# Altium PCB Preamp.PcbDoc
Units mil, origin at the board's own origin, x right, y up, seen from the top; angles counter-clockwise.
Board outline 2086.61 x 2834.65 mil, 2 copper layers (Top Layer, Bottom Layer); 45 components, 34 nets, 142 pads, 16 vias.
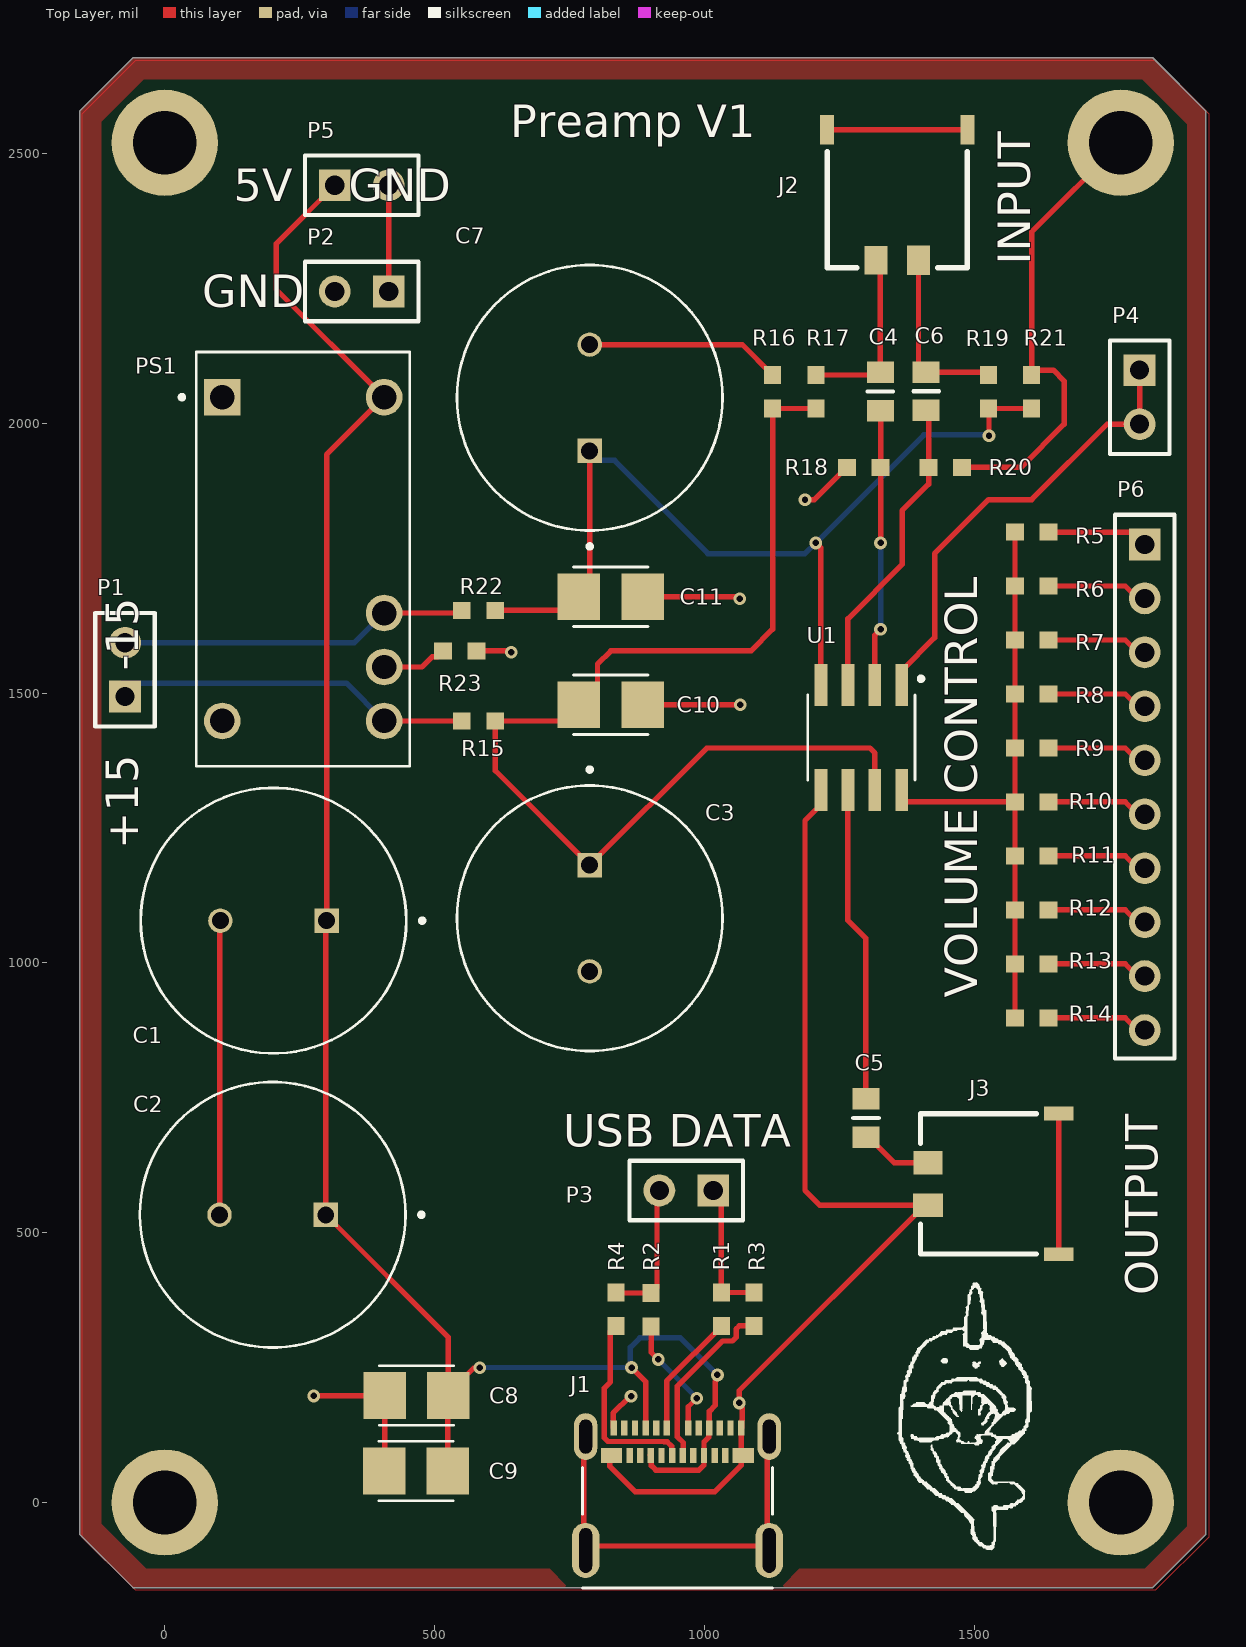
[diagram p0: Top Layer view]
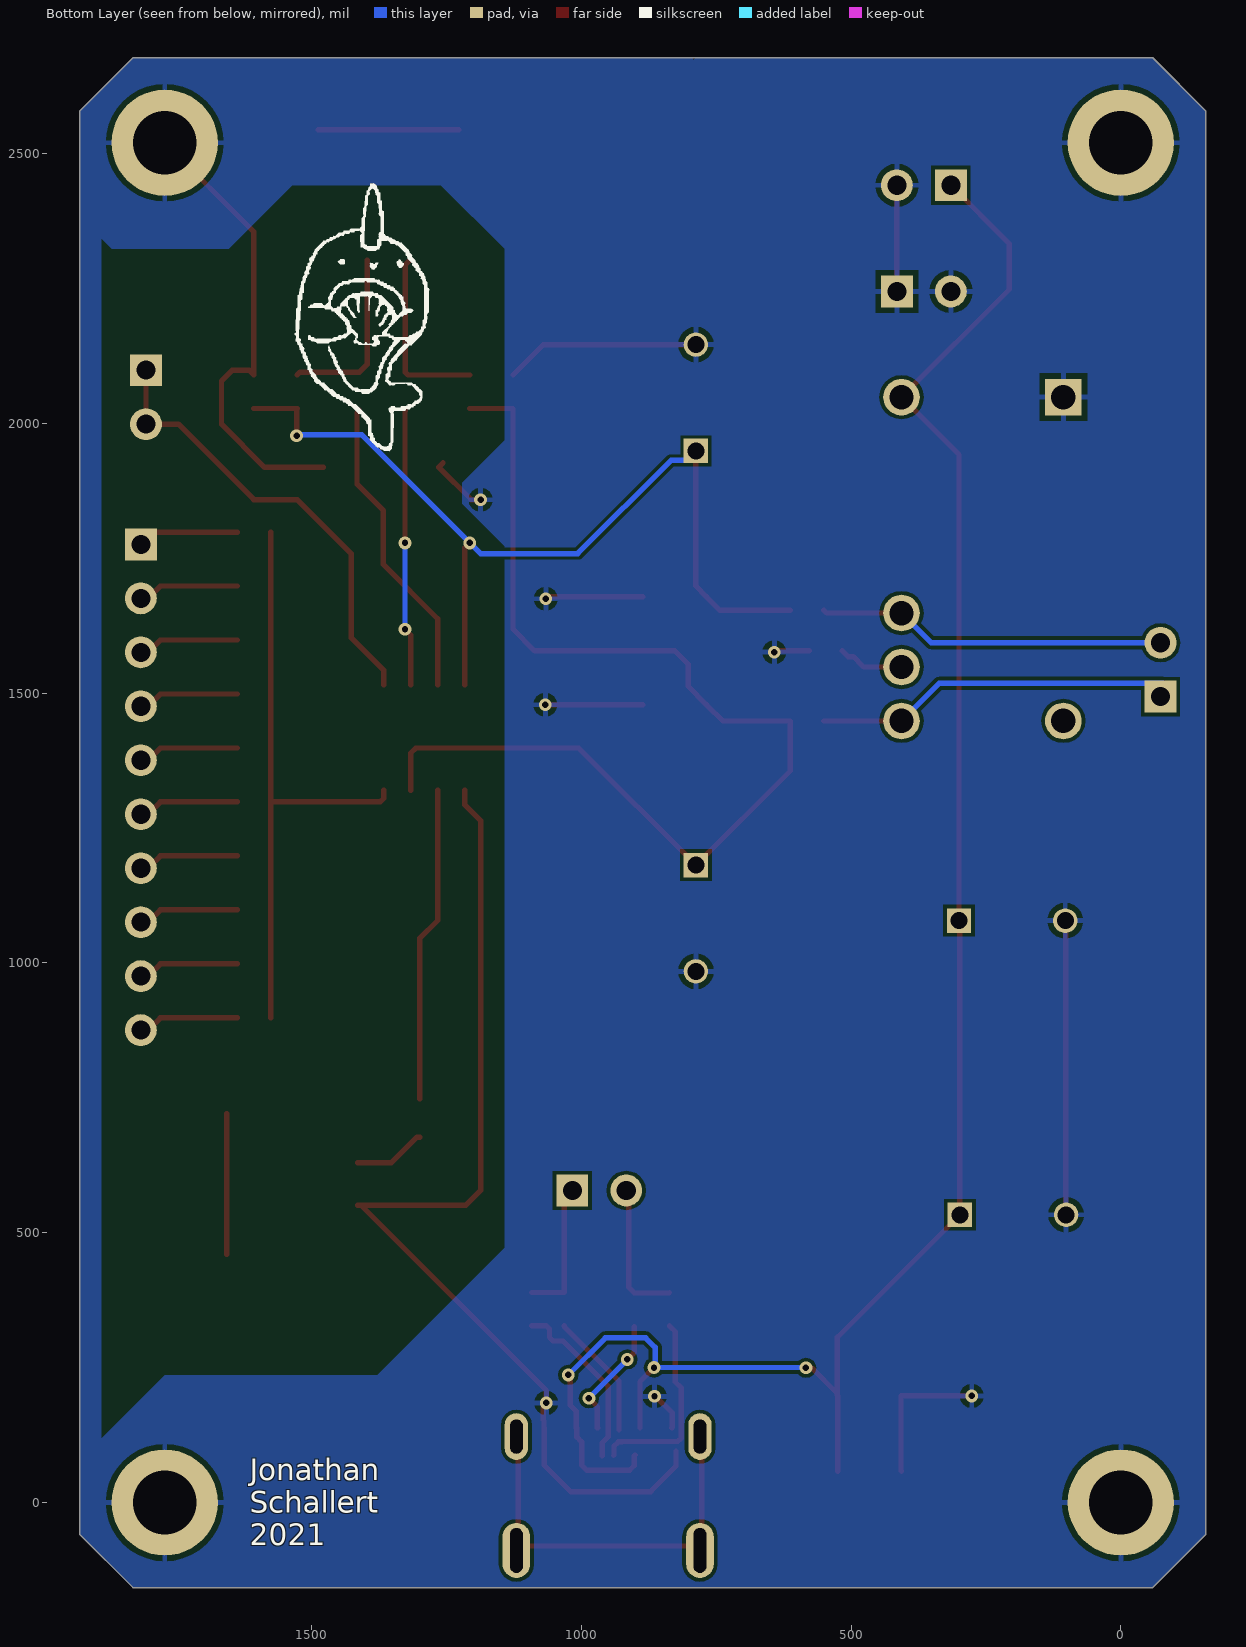
[diagram p1: Bottom Layer view, seen from below]
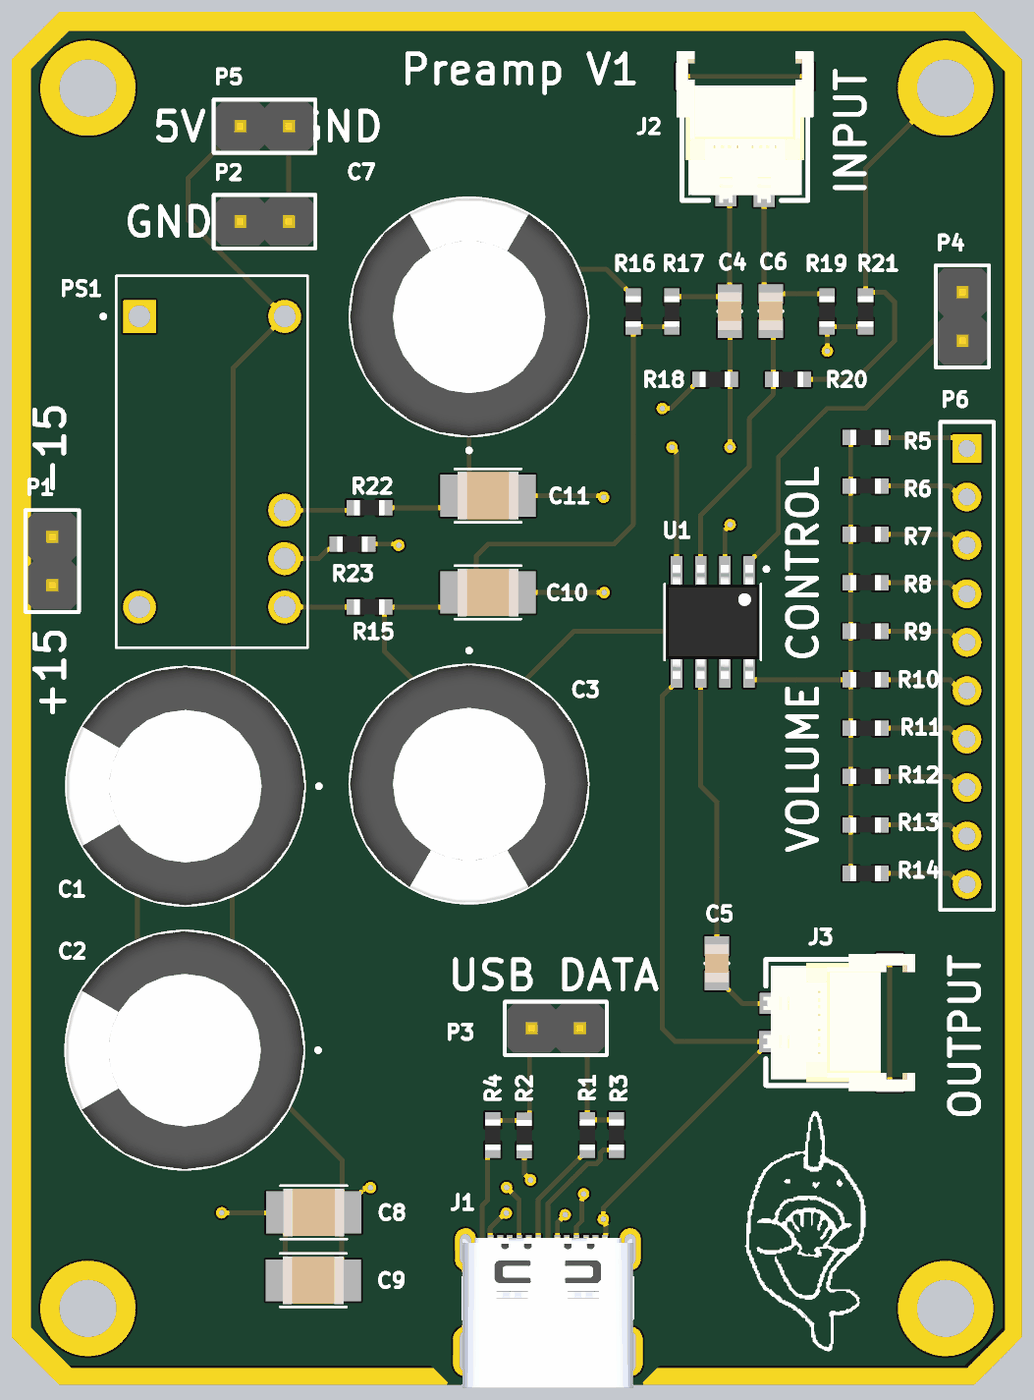
[diagram p2: 3D render of the assembled board from above, using the file's embedded part models]

## Layer stack, top to bottom
Top Solder: solder mask 0.4, Solder Resist, Dk 3.5
Top Layer: signal copper 1.4
Dielectric 1: dielectric 12.6, FR-4, Dk 4.8
Bottom Layer: signal copper 1.4
Bottom Solder: solder mask 0.4, Solder Resist, Dk 3.5

## Board outline
-157.48,-59.06 -59.06,-157.48 1830.71,-157.48 1929.13,-59.06 1929.13,2578.74 1830.71,2677.17 -59.06,2677.17 -157.48,2578.74

## Design rules (kind name [scope] priority, off if disabled: settings)
Clearance Clearance_to_Keepout [IsKeepOut] p1: gap=0 ignorepadtopadclearanceinfootprint=FALSE
Clearance [All] p2: gap=6.5 ignorepadtopadclearanceinfootprint=FALSE
Height [All] p1: minheight=0 maxheight=5000 prefheight=500
HoleSize [All] p1: absolutevalues=TRUE maxlimit=500 minlimit=1 maxpercent=80.000 minpercent=20.000
MinimumSolderMaskSliver [All] p1: minsoldermaskwidth=2
PolygonConnect [All] p1: connectstyle=Relief reliefconductorwidth=10 reliefentries=4 polygonreliefangle="90 Angle" airgapwidth=10
RoutingVias [All] p1: holewidth=28 width=50 viastyle="Through Hole" minholewidth=28 minwidth=50 maxholewidth=28 maxwidth=50
SilkToSilkClearance [All] p1: silktosilkclearance=2
SilkToSolderMaskClearance [IsPad] p1: minsilkscreentomaskgap=2 clearancetoexposedcopper=TRUE
SolderMaskExpansion [All] p1: expansion=4 istentingtop=FALSE
Width [All] p1: maxlimit=10 minlimit=8 preferedwidth=10
25 further rules are at their usual default settings.

## Components (designator, comment, footprint, x,y, rotation, side; value= is the part's Value field where it differs from the comment)
C1 "2200uF" CAP-RADIAL-12.5MM 201.46,1078.27 r180 top
C2 "2200uF" CAP-RADIAL-12.5MM 199.88,533.27 r180 top
C3 "2200uF" CAP-RADIAL-12.5MM 787.4,1082.68 r270 top
C4 "22uF" 0805-CAP 1325.83,2058.82 r270 top
C5 "22uF" 0805-CAP 1299.21,712.6 r270 top
C6 "22uF" 0805-CAP 1410.83,2059.25 r270 top
C7 "2200uF" CAP-RADIAL-12.5MM 787.4,2047.24 r90 top
C8 "10uF" 1210-CAP 466.46,198.27 r180 top
C9 "10uF" 1210-CAP 465.51,58.27 r180 top
C10 "10uF" 1210-CAP 826.46,1478.27 r180 top
C11 "10uF" 1210-CAP 826.46,1678.27 r0 top
J1 "WM12856CT-ND" USBC_MOLEX 950,-10 r0 top
J2 "DF59-2S-2V(51)" SNAPBEE_DF59-2S-2V 1357.32,2422.83 r0 top
J3 "DF59-2S-2V(51)" SNAPBEE_DF59-2S-2V 1535.43,590.55 r270 top
P1 "HEADER_1x2" PIN2 -73.54,1493.27 r90 top
P2 "HEADER_1x2" PIN2 414.96,2244.09 r180 top
P3 "HEADER_1x2" PIN2 1016.46,578.27 r180 top
P4 "HEADER_1x2" PIN2 1806.46,2098.27 r270 top
P5 "HEADER_1x2" PIN2 314.96,2440.94 r0 top
P6 "HEADER_1x10" PIN10 1815.91,1775.43 r270 top
PS1 "NMV0515DC" CONV_NMV0515DC 256.46,1748.27 r0 top
R1 "0Ω" 0603_RES 1031.46,358.27 r90 top
R2 "0Ω" 0603_RES 901.46,357.26 r90 top
R3 "0Ω" 0603_RES 1091.46,358.27 r90 top
R4 "0Ω" 0603_RES 836.46,358.27 r90 top
R5 "0Ω" 0603_RES 1606.46,1798.27 r0 top
R6 "0Ω" 0603_RES 1606.46,1698.27 r0 top
R7 "0Ω" 0603_RES 1606.46,1598.27 r0 top
R8 "0Ω" 0603_RES 1606.46,1498.27 r0 top
R9 "0Ω" 0603_RES 1606.46,1398.27 r0 top
R10 "0Ω" 0603_RES 1606.46,1298.27 r0 top
R11 "0Ω" 0603_RES 1606.46,1198.27 r0 top
R12 "0Ω" 0603_RES 1606.46,1098.27 r0 top
R13 "0Ω" 0603_RES 1606.46,998.27 r0 top
R14 "0Ω" 0603_RES 1606.46,898.27 r0 top
R15 "100Ω" 0603_RES 581.46,1448.27 r180 top
R16 "2K2Ω" 0603_RES 1126.46,2058.27 r270 top
R17 "2K2Ω" 0603_RES 1206.46,2058.27 r270 top
R18 "3K9Ω" 0603_RES 1295.45,1918.27 r180 top
R19 "2K2Ω" 0603_RES 1526.46,2058.27 r90 top
R20 "3K9Ω" 0603_RES 1446.46,1918.27 r180 top
R21 "2K2Ω" 0603_RES 1606.46,2058.27 r90 top
R22 "100Ω" 0603_RES 581.46,1653.27 r180 top
R23 "0Ω" 0603_RES 546.46,1578.27 r0 top
U1 "1512S08-U" SOIC-8_N 1290.83,1417.52 r270 top

## Footprints (in the part's own frame and the unit in brackets; to place one, negate y for a bottom-side part, rotate by r counter-clockwise, add the part's x,y. Pads: shape width x height; smd on the part's side, far side on the other; paste and mask are expansions set on the pad)
0603_RES [mil]
  rect 33x31.5 smd: 1(-31,0) 2(31,0)
  body extent -31,-16 31,16, height 18
0805-CAP [mil] "Chip Capacitor"
  rect 40x50 smd: 1(-35.43,0) 2(35.43,0)
  silkscreen extent 0,-24 0,24, body extent -39,-25 39,25, height 24
1210-CAP [mm]
  rect 2x2.2 smd: 1(-1.5,0) 2(1.5,0)
  silkscreen extent -1.75,-1.4 1.75,1.4, body extent -1.6,-1.25 1.6,1.25, height 0.79
CAP-RADIAL-12.5MM [mm]
  round 1.15 hole 0.8: N(2.5,0)
  rect 1.15x1.15 hole 0.8: P(-2.5,0)
  silkscreen extent -7.1,-6.25 6.25,6.25, body extent -6.25,-6.25 6.25,6.25, height 27
CONV_NMV0515DC [mm]
  rect 1.725x1.725 hole 1.15: 1(-3.81,7.62)
  round 1.725 hole 1.15: 7(-3.81,-7.62) 8(3.81,-7.62) 9(3.81,-5.08) 10(3.81,-2.54) 14(3.81,7.62)
  silkscreen extent -5.81,-9.75 5.01,9.75
PIN2 [mm] "2x1 Header 0.1mm"
  rect 1.5x1.5 hole 0.9: 1(0,0)
  round 1.5 hole 0.9: 2(2.54,0)
  silkscreen extent -1.4,-1.4 3.94,1.4, body extent -1.27,-1.27 3.81,1.27, height 10.11
PIN10 [mm] "4x1 Header 0.1mm"
  rect 1.5x1.5 hole 0.9: 1(0,0)
  round 1.5 hole 0.9: 2(2.54,0) 3(5.08,0) 4(7.62,0) 5(10.16,0) 6(12.7,0) 7(15.24,0) 8(17.78,0) 9(20.32,0) 10(22.86,0)
  silkscreen extent -1.4,-1.4 24.2,1.4
SNAPBEE_DF59-2S-2V [mm] "CONN SSL RCPT 2POS 2MM SOLDER"
  rect 1.1x1.35 smd: 1(-1,-3.075)
  rect 1.1x1.4 smd: 2(1,-3.075)
  rect 0.65x1.4 smd: S1(-3.31,3.075) S2(3.31,3.075)
  silkscreen extent -3.3,-3.43 3.3,2.03, body extent -3.6,-3.56 3.6,4.39, height 2.31
SOIC-8_N [mm]
  rect 1.97x0.6 smd: 1(-2.475,1.905) 2(-2.475,0.635) 3(-2.475,-0.635) 4(-2.475,-1.905) 5(2.475,-1.905) 6(2.475,-0.635) 7(2.475,0.635) 8(2.475,1.905)
  silkscreen extent -2.87,-2.52 2,2.91, body extent -3,-2.45 3,2.45, height 1.75
USBC_MOLEX [mm] "105450-0101"
  rect 0.3x0.7 smd: A1(-3,3.77) A2(-2.5,3.77) A3(-2,3.77) A4(-1.5,3.77) A5(-1,3.77) A6(-0.5,3.77) A7(0.5,3.77) A8(1,3.77) A9(1.5,3.77) A10(2,3.77) A11(2.5,3.77) A12(3,3.77) B2(2.25,2.47) B3(1.75,2.47) B4(1.25,2.47) B5(0.75,2.47) B6(0.25,2.47) B7(-0.25,2.47) B8(-0.75,2.47) B9(-1.25,2.47) B10(-1.75,2.47) B11(-2.25,2.47)
  rect 1x0.7 smd: B1(3.1,2.47) B12(-3.1,2.47)
  oval 1.1x2.2 hole 0.6 slot 1.6 at 90 deg: S1(-4.32,3.36) S2(4.32,3.36)
  oval 1.3x2.6 hole 0.6 slot 2.1 at 90 deg: S3(-4.32,-2) S4(4.32,-2)
  silkscreen extent -4.47,-3.77 4.47,1.9, body extent -4.47,-3.9 4.47,4, height 3.25

## Part data
C1 C2 C3 C7: library part UFW1C222MHD, "CAP ALUM 2200UF 20% 16V RADIAL", Package="RADIAL-2 Panasonic", Supplier Part Number 1=493-15122-ND, Availability="In Stock", Check_prices=https://www.snapeda.com/parts/EEUHD1V681B/Panasonic/view-part/5784870/?ref=eda, MF=Panasonic, MP=EEUHD1V681B, Price=None, Purchase-URL=https://pricing.snapeda.com/search/part/EEUHD1V681B/?ref=eda, SnapEDA_Link=https://www.snapeda.com/parts/EEUHD1V681B/Panasonic/view-part/5784870/?ref=snap, Supplier 1=Digi-Key
C4 C5 C6: library part CAP_22U_0805, "CAP CER 22UF 16V X5R 0805", Supplier Part Number 1=1276-6526-1-ND, LatestRevisionDate=17-Jul-2002, LatestRevisionNote="Re-released for DXP Platform.", PackageDescription="Radial Cap, Thru-Hole; 2 Leads; 0.3 in Pin Spacing", PackageReference=RAD-0.3, Published=8-Jun-2000, Publisher="Altium Limited", Supplier 1=Digi-Key
C8 C9 C10 C11: library part CAP_10U_1210, "CAP CER 10UF 25V X7R 1210", Supplier Part Number 1=445-8792-1-ND, LatestRevisionDate=17-Jul-2002, LatestRevisionNote="Re-released for DXP Platform.", PackageDescription="Radial Cap, Thru-Hole; 2 Leads; 0.3 in Pin Spacing", PackageReference=RAD-0.3, Published=8-Jun-2000, Publisher="Altium Limited", Supplier 1=Digi-Key
J1: library part USB-C, "CONN RCP USB3.1 TYPEC 24P SMD RA", Package=None, Digi-Key_Part_Number=WM12856CT-ND, Digi-Key_Purchase_URL=https://www.digikey.tw/product-detail/en/molex/1054500101/WM12856CT-ND/5843891?utm_source=snapeda&utm_medium=aggregator&utm_campaign=symbol, MF=Molex, MP=1054500101, SnapEDA_Link=https://www.snapeda.com/parts/1054500101/Molex/view-part/448528/?ref=snap, Supplier 1=Digi-Key, Supplier Part Number 1=WM12856CT-ND
J2 J3: library part SNAPBEE_DF59-2S-2V, "CONN SSL RCPT 2POS 2MM SOLDER", Supplier Part Number 1=H11961CT-ND, Supplier 1=Digi-Key, Supplier 2=Digi-Key, Supplier 3=Digi-Key, Supplier Part Number 2=H11958-ND, Supplier Part Number 3=H11957CT-ND
PS1: "Isolated 1W Dual Output DC-DC Converter 3kVDC, 4.5-9V Input", Package=None, Supplier Part Number 1=811-3396-5-ND, Availability=Unavailable, MP=NMV0515DC, Price=None, Supplier 1=Digi-Key
R1 R2 R3 R4 R5 R6 R7 R8 R9 R10 R11 R12 R13 R14 R23: library part RES_0R_0603, "RES SMD 0 OHM JUMPER 1/10W 0603", Supplier Part Number 1=311-0.0GRDKR-ND, LatestRevisionDate=17-Jul-2002, LatestRevisionNote="Re-released for DXP Platform.", PackageDescription="Axial Device, Thru-Hole; 2 Leads; 0.3 in Pin Spacing", PackageReference=AXIAL-0.3, Published=8-Jun-2000, Publisher="Altium Limited", Supplier 1=Digi-Key
R15 R22: library part RES_100R_0603, "RES SMD 100 OHM 1% 1/10W 0603", Supplier Part Number 1=311-100HRCT-ND, LatestRevisionDate=17-Jul-2002, LatestRevisionNote="Re-released for DXP Platform.", PackageDescription="Axial Device, Thru-Hole; 2 Leads; 0.3 in Pin Spacing", PackageReference=AXIAL-0.3, Published=8-Jun-2000, Publisher="Altium Limited", Supplier 1=Digi-Key
R16 R17 R19 R21: library part RES_2K2_0603, "RES SMD 2.2K OHM 1% 1/10W 0603", Supplier Part Number 1=311-2.20KHRCT-ND, LatestRevisionDate=17-Jul-2002, LatestRevisionNote="Re-released for DXP Platform.", PackageDescription="Axial Device, Thru-Hole; 2 Leads; 0.3 in Pin Spacing", PackageReference=AXIAL-0.3, Published=8-Jun-2000, Publisher="Altium Limited", Supplier 1=Digi-Key
R18 R20: library part RES_3K9_0603, "RES SMD 3.9KOHM 0.05% 1/10W 0603", Supplier Part Number 1=P3.9KBECT-ND, LatestRevisionDate=17-Jul-2002, LatestRevisionNote="Re-released for DXP Platform.", PackageDescription="Axial Device, Thru-Hole; 2 Leads; 0.3 in Pin Spacing", PackageReference=AXIAL-0.3, Published=8-Jun-2000, Publisher="Altium Limited", Supplier 1=Digi-Key
U1: "IC MIC PREAMP HIGH PERFORM. AUDIO 0dB SOIC-8", Case/Package=SO, Manufacturer 1="NXP Semiconductors", Manufacturer Part Number 1=TJA1040T/CM,118, Max Operating Temperature=150°C, Max Supply Current=70mA, Max Supply Voltage=5.25V, Min Operating Temperature=-40°C, Min Supply Voltage=4.75V, Operating Supply Voltage=5V, Package Quantity=1, Supplier Part Number 1=887-1512S08-U, ComponentLink1Description=https://datasheet.ciiva.com/26933/getdatasheetpartid-728716-26933443.pdf?src-supplier=Verical, ComponentLink1URL=https://datasheet.ciiva.com/26933/getdatasheetpartid-728716-26933443.pdf?src-supplier=Verical, ComponentLink2Description=https://datasheet.ciiva.com/16514/tja1040-16514421.pdf?src-supplier=Future+Electronics, ComponentLink2URL=https://datasheet.ciiva.com/16514/tja1040-16514421.pdf?src-supplier=Future+Electronics, ComponentLink3Description=https://datasheet.ciiva.com/18624/tja1040-18624870.pdf?src-supplier=Digi-Key, ComponentLink3URL=https://datasheet.ciiva.com/18624/tja1040-18624870.pdf?src-supplier=Digi-Key, ComponentLink4Description=https://datasheet.ciiva.com/18624/tja1040-18624871.pdf?src-supplier=Digi-Key, ComponentLink4URL=https://datasheet.ciiva.com/18624/tja1040-18624871.pdf?src-supplier=Digi-Key, Contact Plating=Gold, Data Rate=1Mbps, Interface=Serial, Lead Free="Lead Free", Mount="Surface Mount", Nominal Supply Current=70mA, Number of Pins=8, Number of Receive Buffers=1, Number of Transceivers=1, Number of Transmit Buffers=1, Packaging="Tape and Reel", Pricing 1="1=1.43000, 10=1.28200, 100=0.99950, 500=0.82566, 1000=0.65184 (USD)", Radiation Hardening=No, REACH SVHC="No SVHC", Receiver Hysteresis=70mV, RoHS=Yes, Simplex/Duplex="Half Duplex", Stock 1=18495, Supplier 1=Mouser

## Free pads (board coordinates)
  round 196.85 hole 118.11: 1(0,0) 2(0,2519.69) 3(1771.65,0) 4(1771.65,2519.69)

## Via types
v1: diameter 23.62, hole 11.81, Top Layer to Bottom Layer, 16 vias

## Nets (pads, with @x,y where several pads share a name; then routed paths per layer and width w, separated by ;. In a path a pad name is that pad's centre, name@x,y a point inside that pad or via, vN(x,y) a via of type N, cw(c..) or ccw(c..) an arc to the next point about the centre after c; other vN are vias at no path point)
+5: C1.P C2.P C8.1 C9.1 J1.A4 J1.A9 J1.B4 J1.B9 P5.1 PS1.14 | length 3661.1
  Top Layer w10: P5.1 206.46,2332.44 206.46,2248.27 PS1.14 299.88,1941.69 C1.P 298.31,1076.69 C2.P 525.51,306.06 C8.1@525.51,202.2 ; C9.1 524.57,197.32 C8.1 C8.1@525.51,202.2 ; v1@572.57,249.27 C8.1@525.51,202.2 ; v1(865,250) 890.94,224.06 J1.A4 ; J1.B9@899.88,88.15 J1.B9 901.69,86.34 901.69,68.31 910,60 990,60 999.21,69.21 J1.B4 999.21,112.32 1008.15,121.26 1008.15,137.52 J1.A9 1009.06,169.06 1020,180 1020,223.83 1021.41,225.24 1021.41,233.89 v1(1024.01,236.5)
  Bottom Layer w10: v1@581.31,250.27 865.46,250.27 862.85,252.87 862.85,287.66 880.46,305.27 955.25,305.27 v1(1024.01,236.5)
  other v1: 583.55,249.55
+15: P1.1 PS1.8 R15.2 | length 685.1
  Top Layer w10: PS1.8 R15.2
  Bottom Layer w10: P1.1 -78.54,1498.27 -78.54,1518.27 336.46,1518.27 PS1.8
-15: P1.2 PS1.10 R22.2 | length 648.8
  Top Layer w10: PS1.10 545.45,1648.27 R22.2
  Bottom Layer w10: P1.2 351.46,1593.27 PS1.10
D+: P3.1 R1.2 R3.2 | length 255.2
  Top Layer w10: P3.1 1031.46,563.27 R1.2 R3.2
D-: P3.2 R2.2 R4.2 | length 261.6
  Top Layer w10: R4.2 837.46,388.27 R2.2 912.2,399.02 912.2,574.02 P3.2
DRAIN: C4.1 J2.1 R17.1 | length 332.2
  Top Layer w10: R17.1 1320.85,2089.27 C4.1 1325.83,2293.9 J2.1
GND: C1.N C2.N C3.N C7.N C8.2 C9.2 C10.1 C11.2 J1.A1 J1.A12 J1.B1 J1.B12 J3.2 P2.1 P2.2 P5.2 pad.1 pad.2 pad.3 pad.4 PS1.1 R16.1 R18.2 R20.1 R21.2 R23.2 U1.5 | length 4801.5
  Top Layer w10: C2.N 102.24,534.06 102.24,1077.48 C1.N ; v1(276.3,197.56) 406.69,197.56 C8.2 407.4,59.21 C9.2 ; P2.1 P5.2 ; R23.2 v1@646.46,1578.27 ; C7.N 1070.06,2145.67 R16.1 ; J1.B12@824.41,95.51 824.41,67.31 871.46,20.27 1019.46,20.27 1068.5,69.31 1068.5,138.03 J1.A12 1069.02,139.33 1069.02,151.94 1070,152.93 1070,175.45 1064.57,180.88 v1(1064.57,184.57) 1064.57,207.28 J3.2@1408.46,551.18 ; J1.A1 830.98,139.33 830.98,165.59 862.24,196.85 v1(864.09,196.85) ; C10.1 v1(1066.46,1478.27) ; C11.2 v1@1066.46,1678.27 ; v1(1186.46,1858.27) 1203.7,1858.27 1263.7,1918.27 R18.2 R18.2@1256.13,1926.58 ; U1.5 1215.83,1293.11 1186.46,1263.74 1186.46,578.27 1213.54,551.18 J3.2@1408.46,551.18 ; J3.2 J3.2@1408.46,551.18 ; R20.1 1586.46,1918.27 1666.46,1998.27 1666.46,2078.27 1646.46,2098.27 1615.45,2098.27 R21.2 1606.46,2354.49 pad.4
  other v1: 642.09,1575.71 1065.47,1674.82
NetC3_P: C3.P C10.2 R15.1 R16.2 R17.2 U1.7 | length 2128.1
  Top Layer w10: R17.2 R16.2 1126.46,1618.27 1086.46,1578.27 826.46,1578.27 801.77,1553.58 801.77,1512.64 C10.2 737.4,1448.27 R15.1 612.46,1356.04 C3.P 1004.57,1398.27 1306.46,1398.27 1315.83,1388.9 U1.7
NetC4_2: C4.2 R18.1 U1.2 | length 513.1
  Top Layer w10: U1.2 1315.83,1607.64 v1(1326.46,1618.27) ; C4.2 1326.46,2022.76 R18.1 v1(1326.46,1778.27)
  Bottom Layer w10: v1(1326.46,1618.27) v1(1326.46,1778.27)
NetC5_1: C5.1 U1.6 | length 585.9
  Top Layer w10: U1.6 1265.83,1078.9 1299.21,1045.51 C5.1
NetC6_2: C6.2 R20.2 U1.3 | length 572.8
  Top Layer w10: U1.3 1265.83,1637.64 1366.46,1738.27 1366.46,1838.27 1415.45,1887.26 R20.2 1415.45,2019.19 C6.2
NetC7_P: C7.P C11.1 R19.1 R21.1 R22.1 U1.4 | length 1751.3
  Top Layer w10: R22.1 742.4,1653.27 C11.1 787.4,1698.27 C7.P ; v1(1206.46,1778.27) 1215.83,1768.9 U1.4 ; v1(1527.34,1976.74) 1527.34,2026.38 R19.1 R21.1
  Bottom Layer w10: C7.P 805.04,1931.18 833.54,1931.18 1006.46,1758.27 1186.46,1758.27 v1(1206.46,1778.27) 1406.46,1978.27 v1@1526.46,1978.27
NetJ1_A6: J1.A6 R1.1 | length 234.8
  Top Layer w10: J1.A6@930,134.49 930,225.06 1031.46,326.51 R1.1
NetJ1_A7: J1.A7 R2.1 | length 229.4
  Top Layer w10: R2.1 901.46,278.27 v1(914.46,265.27) ; J1.A7 970,138.74 970,177.52 v1(985.74,193.27)
  Bottom Layer w10: v1(914.46,265.27) 914.46,264.91 985.74,193.62 v1(985.74,193.27)
NetJ1_B6: J1.B6 R3.1 | length 330.1
  Top Layer w10: J1.B6@960.75,86.85 960.75,110.98 950,121.72 950,215.81 1033.45,299.26 1051.97,299.26 1058.7,306 1058.7,321.41 1064.56,327.26 R3.1
NetJ1_B7: J1.B7 R4.1 | length 365.2
  Top Layer w10: R4.1 825.71,316.52 825.71,223.44 814.48,212.21 814.48,119.88 821.22,113.15 924.38,113.15 925,112.52 931.14,112.52 939.25,104.41 939.25,88.15 J1.B7
NetJ1_S1: J1.S1 J1.S2 J1.S3 J1.S4 | length 762.2
  Top Layer w10: J1.S1@776.38,130.55 776.38,-80.47 1116.54,-80.47 J1.S2@1116.54,130.55
NetJ2_S1: J2.S1 J2.S2 | length 260.6
  Top Layer w10: J2.S1 J2.S2
NetJ3_S1: J3.S1 J3.S2 | length 260.6
  Top Layer w10: J3.S2 J3.S1
NetP6_1: P6.1 R5.2 | length 187.9
  Top Layer w10: R5.2 1793.07,1798.27 P6.1
NetP6_2: P6.2 R6.2 | length 187.9
  Top Layer w10: R6.2 1779.8,1698.27 1802.63,1675.43 P6.2
NetP6_3: P6.3 R7.2 | length 187.9
  Top Layer w10: R7.2 1779.8,1598.27 1802.63,1575.43 P6.3
NetP6_4: P6.4 R8.2 | length 187.9
  Top Layer w10: R8.2 1779.8,1498.27 1802.63,1475.43 P6.4
NetP6_5: P6.5 R9.2 | length 187.9
  Top Layer w10: R9.2 1779.8,1398.27 1802.63,1375.43 P6.5
NetP6_6: P6.6 R10.2 | length 187.9
  Top Layer w10: R10.2 1779.8,1298.27 1802.63,1275.43 P6.6
NetP6_7: P6.7 R11.2 | length 187.9
  Top Layer w10: R11.2 1779.8,1198.27 1802.63,1175.43 P6.7
NetP6_8: P6.8 R12.2 | length 187.9
  Top Layer w10: R12.2 1779.8,1098.27 1802.63,1075.43 P6.8
NetP6_9: P6.9 R13.2 | length 187.9
  Top Layer w10: R13.2 1779.8,998.27 1802.63,975.43 P6.9
NetP6_10: P6.10 R14.2 | length 187.9
  Top Layer w10: R14.2 1779.8,898.27 1802.63,875.43 P6.10
NetPS1_9: PS1.9 R23.1 | length 122.1
  Top Layer w10: PS1.9 476.46,1548.27 495.71,1567.52 505.37,1567.52 R23.1@516.12,1578.27
OUTPUT: C5.2 J3.1 | length 134.7
  Top Layer w10: C5.2 1304.21,677.17 1351.46,629.92 J3.1
RG1: P4.1 P4.2 U1.1 | length 847.8
  Top Layer w10: U1.1 1365.83,1541.93 1426.46,1602.56 1426.46,1758.27 1526.46,1858.27 1606.46,1858.27 1746.46,1998.27 P4.2 P4.1
RG2: R5.1 R6.1 R7.1 R8.1 R9.1 R10.1 R11.1 R12.1 R13.1 R14.1 U1.8 | length 1127.4
  Top Layer w10: U1.8 1365.83,1305.08 1372.64,1298.27 R10.1 ; R14.1 R13.1 R12.1 R11.1 R10.1 ; R5.1 R6.1 R7.1 R8.1 R9.1 R10.1
SOURCE: C6.1 J2.2 R19.2 | length 330.8
  Top Layer w10: J2.2 1396.69,2108.82 C6.1 1521.04,2094.69 R19.2
pads on no net: J1.A2 J1.A3 J1.A5 J1.A8 J1.A10 J1.A11 J1.B2 J1.B3 J1.B5 J1.B8 J1.B10 J1.B11 PS1.7

## Polygon pours and split planes (outlines as drawn)
GND on Bottom Layer "NONET_L-01_P-001" (solid, pour order 8): 1929.13,2381.89 1889.76,2342.52 1889.76,118.11 1929.13,78.74
GND on Bottom Layer "NONET_L-01_P-001" (solid, pour order 0): -59.06,2677.17 787.4,2677.17 1141.73,2322.83 1141.73,472.44 1377.95,236.22 1771.65,236.22 1929.13,78.74 1929.13,-59.06 1830.71,-157.48 -59.06,-157.48 -157.48,-59.06 -157.48,2578.74
GND on Bottom Layer "NONET_L-01_P-001" (solid, pour order 3): 1141.73,1968.5 1220.47,1889.76 1220.47,1850.39 1141.73,1771.65
GND on Bottom Layer "NONET_L-01_P-001" (solid, pour order 1): 787.4,2677.17 1830.71,2677.17 1929.13,2578.74 1929.13,2381.89 1870.08,2322.83 1653.54,2322.83 1535.43,2440.94 1259.84,2440.94 1141.73,2322.83
no net on Top Layer "NONET_L-01_P-001" (solid, pour order 7): -152.48,2573.74 -54.06,2672.17 1835.71,2672.17 1934.13,2573.74 1934.13,-64.06 1835.71,-162.48 -54.06,-162.48 -152.48,-64.06
no net on Top Layer "NONET_L-01_P-001" (solid, pour order 5): -157.48,2578.74 -59.06,2677.17 1830.71,2677.17 1929.13,2578.74 1929.13,-59.06 1830.71,-157.48 -59.06,-157.48 -157.48,-59.06
no net on Top Solder "NONET_L-01_P-001" (solid): -157.48,2578.74 -59.06,2677.17 1830.71,2677.17 1929.13,2578.74 1929.13,-59.06 1830.71,-157.48 -59.06,-157.48 -157.48,-59.06
no net on Bottom Solder "NONET_L-01_P-001" (solid): -157.48,2578.74 -59.06,2677.17 1830.71,2677.17 1929.13,2578.74 1929.13,-59.06 1830.71,-157.48 -59.06,-157.48 -157.48,-59.06

## Other copper
Top Layer:
  pour cut-out: -113.11,2554.05 -34.37,2632.8 1816.02,2632.8 1894.76,2554.06 1894.76,-44.37 1816.02,-123.11 1176.1,-123.11 1136.73,-162.48 753.03,-162.48 713.66,-123.11 -34.37,-123.11 -113.11,-44.37
  pour cut-out: -118.11,2559.05 -39.37,2637.8 1811.02,2637.8 1889.76,2559.06 1889.76,-39.37 1811.02,-118.11 1161.42,-118.11 1122.05,-157.48 748.03,-157.48 708.66,-118.11 -39.37,-118.11 -118.11,-39.37

## Silkscreen, mask and mechanical layers (free items; w line width, h text height)
Top Overlay:
  drawing of 4 lines, arcs and shapes, not listed
  text "Preamp V1" at 639.92,2529.99 h60
  text "5V    GND" at 128.11,2411.57 h60
  text "INPUT" at 1604.17,2293.46 h60 r90
  text "GND" at 69.06,2214.72 h60
  text "+15      -15" at -49.37,1210.79 h60 r90
  text "VOLUME CONTROL" at 1505.75,935.2 h60 r90
  text "USB DATA" at 738.35,659.61 h60
  text "OUTPUT" at 1840.39,384.02 h60 r90
Bottom Overlay:
  drawing of 4 lines, arcs and shapes, not listed
  text "Jonathan  / Schallert / 2021" at 1614.17,-78.74 h40
Top Solder:
  pour cut-out: -118.11,2559.05 -39.37,2637.8 1811.02,2637.8 1889.76,2559.06 1889.76,-39.37 1811.02,-118.11 1181.1,-118.11 1141.73,-157.48 748.03,-157.48 708.66,-118.11 -39.37,-118.11 -118.11,-39.37
Bottom Solder:
  pour cut-out: -118.11,2559.05 -39.37,2637.8 1811.02,2637.8 1889.76,2559.06 1889.76,-39.37 1811.02,-118.11 1181.1,-118.11 1141.73,-157.48 748.03,-157.48 708.66,-118.11 -39.37,-118.11 -118.11,-39.37
Board Outline:
  the board outline again, w10